# Altium PCB BOOSTController2.PcbDoc
Units mm, origin at the board's own origin, x right, y up, seen from the top; angles counter-clockwise.
Board outline 81.01 x 41 mm, 2 copper layers (Top Layer, Bottom Layer); 11 components, 5 nets, 27 pads, 4 vias.
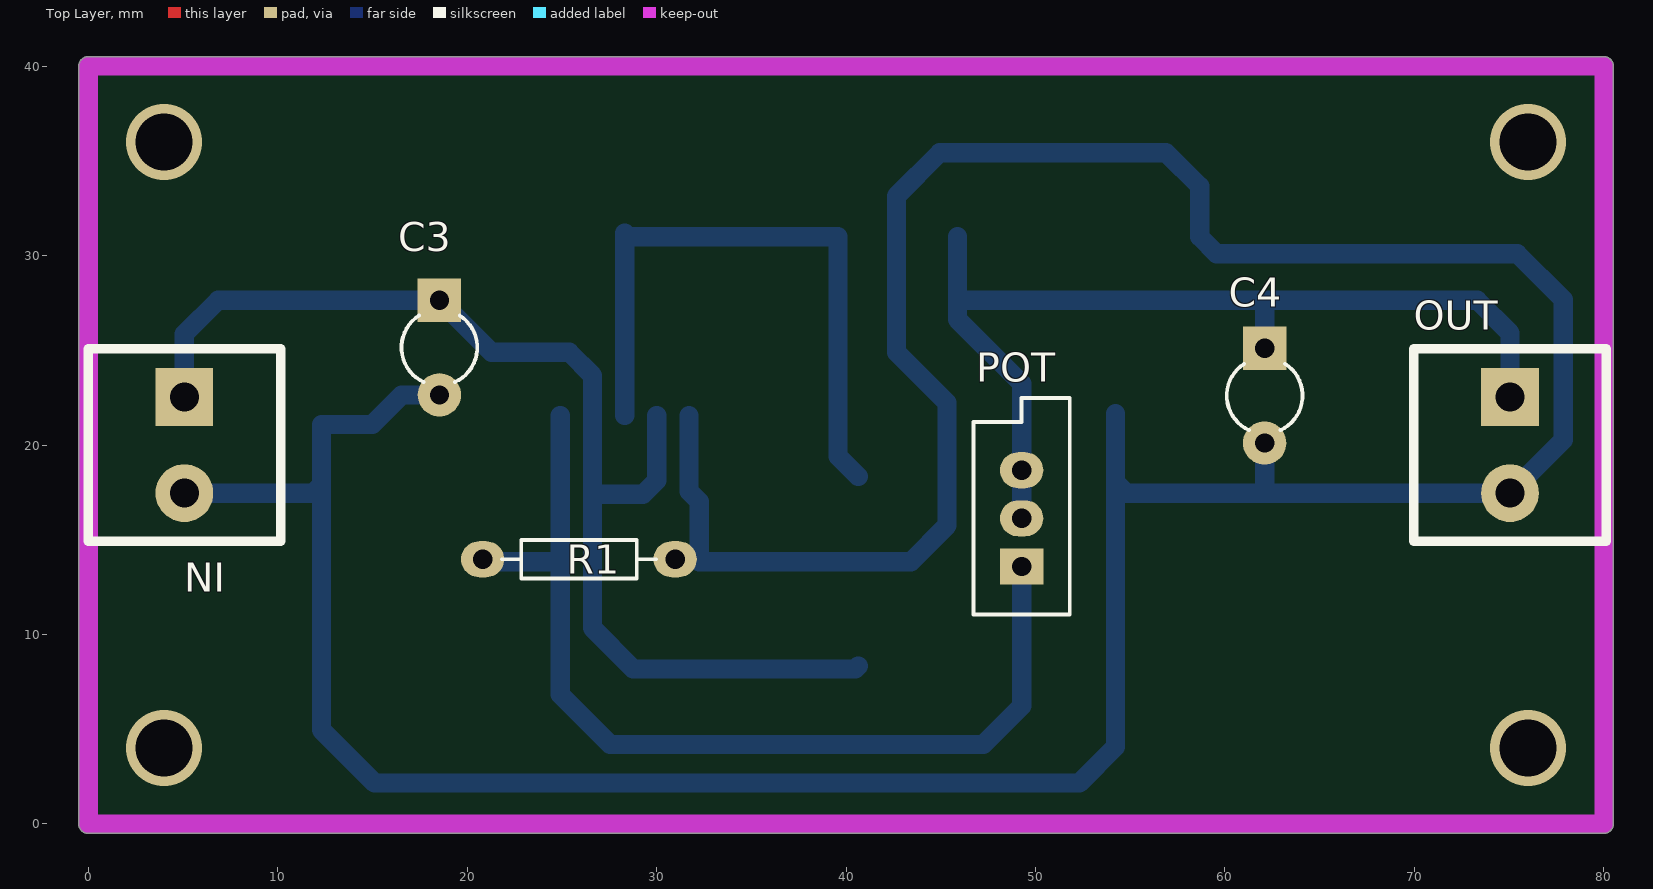
[diagram p0: Top Layer view]
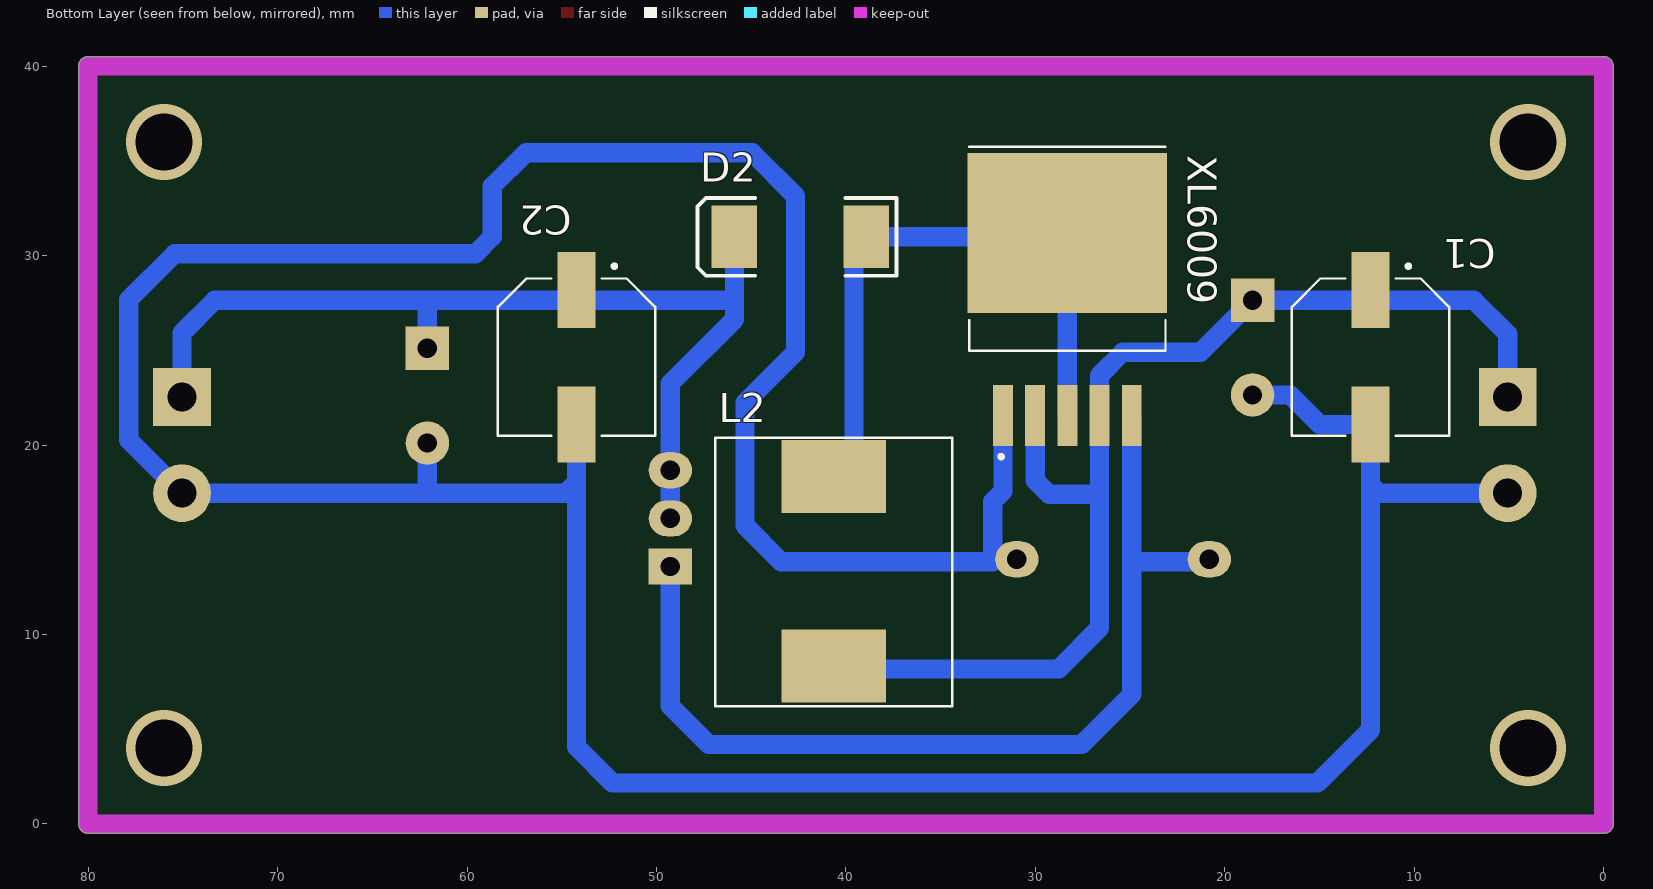
[diagram p1: Bottom Layer view, seen from below]

## Layer stack, top to bottom
Top Solder: solder mask 0.0102, Solder Resist, Dk 3.5
Top Layer: signal copper 0.0356
Dielectric 1: dielectric 0.32, FR-4, Dk 4.8
Bottom Layer: signal copper 0.0356
Bottom Solder: solder mask 0.0102, Solder Resist, Dk 3.5

## Board outline
-0.5,0.1 ccw(c-0.01,0) -0.01,-0.5 80,-0.5 ccw(c80,0) 80.5,0 80.5,40 ccw(c80,40) 80,40.5 0,40.5 ccw(c0,40) -0.5,40

## Design rules (kind name [scope] priority, off if disabled: settings)
Clearance [All] p1: gap=0.254
PolygonConnect [All] p1: connectstyle=Relief reliefconductorwidth=0.254 reliefentries=4 polygonreliefangle="90 Angle" airgapwidth=0.254
RoutingVias [All] p1: holewidth=0.711 width=1.27 viastyle="Through Hole" minholewidth=0.711 minwidth=1.27 maxholewidth=0.711 maxwidth=1.27
SolderMaskExpansion [All] p1: expansion=0.102
Width [All] p1: maxlimit=1.016 minlimit=1.016 preferedwidth=1.016 minimp=50.000000 maximp=50.000000 favimp=50.000000
30 further rules are at their usual default settings.

## Components (designator, comment, footprint, x,y, rotation, side; value= is the part's Value field where it differs from the comment)
C1 "" CapacitorSmd 12.309,24.638 r270 bottom
C2 "" CapacitorSmd 54.219,24.638 r270 bottom
C3 "" CAPR5-4X5 18.532,25.146 r270 top
C4 "" CAPR5-4X5 62.093,22.606 r270 top
D2 "SS34" SMC 42.408,30.988 r0 bottom
IN "Rosita2" Rosita2 5.07,20 r270 top
L2 "" L125 40.63,13.335 r90 bottom
OUT "Rosita2" Rosita2 75.047,20 r270 top
POT "POT Blue" "POT - Blue" 49.266,13.589 r180 top
R1 "Res2" AXIAL-0.4 25.898,13.97 r180 top
XL6009 "XL6009" XL6009 28.311,27.686 r90 bottom

## Footprints (in the part's own frame and the unit in brackets; to place one, negate y for a bottom-side part, rotate by r counter-clockwise, add the part's x,y. Pads: shape width x height; smd on the part's side, far side on the other; paste and mask are expansions set on the pad)
AXIAL-0.4 [mil] "Axial Device, Thru-Hole; 2 Leads; 0.4 in Pin Spacing"
  oval 90x75 hole 40: 1(-200,0) 2(200,0)
  silkscreen extent -160,-40 160,40
CapacitorSmd [mm]
  rect 4x2 smd: 1(-3.55,0) 2(3.55,0)
  silkscreen extent -4.9,-4.15 4.15,4.15, body extent -4.85,-4.15 4.85,4.15, height 10.2
CAPR5-4X5 [mil] "Capacitor; 2 Leads"
  rect 90x90 hole 40: 1(-98.43,0)
  round 90 hole 40: 2(98.43,0)
  silkscreen extent -66,-79 72,79
L125 [mm]
  rect 3.85x5.5 smd: 1(-5,0.01) 2(5,0.01)
  silkscreen extent -7.12,-6.24 7.05,6.26
"POT - Blue" [mil]
  rect 90x75 hole 40: 1(0,0)
  oval 90x75 hole 40: 2(0,-100) 3(0,-200)
  silkscreen extent -100,-350 100,100
Rosita2 [mil]
  rect 120x120 hole 60: 1(-100,0)
  round 120 hole 60: 2(100,0)
  silkscreen extent -200,-200 200,200
SMC [mm] "DO-214-AB/SMC; 2 C-Bend Leads; Body 7.9 x 5.9 mm, inc. leads (LxW)"
  rect 2.4x3.3 smd: 1(-3.475,0) 2(3.475,0)
  silkscreen extent -5.07,-2.05 5.43,2.05
XL6009 [mm]
  rect 3.21x1.05 smd: 1(-6.13,3.4) 2(-6.13,1.7) 3(-6.13,0) 4(-6.13,-1.7) 5(-6.13,-3.4)
  rect 8.46x10.53 smd paste-6: 6(3.5,0)
  silkscreen extent -8.4,-5.18 8.05,5.18

## Part data
C1 C2 C3 C4: library part Cap2, "Capacitor"
D2: library part "D Zener", "Schottky Diode [SS34]"
L2: library part Inductor, "Inductor"
R1: "Resistor"

## Via types
v1: diameter 4, hole 3, Top Layer to Bottom Layer, 4 vias

## Nets (pads, with @x,y where several pads share a name; then routed paths per layer and width w, separated by ;. In a path a pad name is that pad's centre, name@x,y a point inside that pad or via, vN(x,y) a via of type N, cw(c..) or ccw(c..) an arc to the next point about the centre after c; other vN are vias at no path point)
GND: C1.2 C2.2 C3.2 C4.2 IN.2 OUT.2 R1.1 XL6009.1 | length 208.2
  Bottom Layer w1.016: IN.2 11.862,17.46 12.309,17.907 ; C3.2 16.54,22.646 14.982,21.088 C1.2 12.309,17.907 ; XL6009.1 31.711,17.555 32.248,17.018 32.248,13.843 43.424,13.843 45.329,15.748 45.329,22.225 42.662,24.892 42.662,33.147 44.948,35.433 56.886,35.433 58.664,33.655 58.664,30.988 59.553,30.099 75.428,30.099 77.851,27.676 77.851,20.264 OUT.2 62.093,17.46 ; C2.2@54.224,21.645 54.224,18.034 ; C4.2 62.093,17.46 ; 12.309,17.907 12.309,4.953 15.103,2.159 52.314,2.159 54.224,4.069 54.224,18.034 ; 54.224,18.034 54.798,17.46 62.093,17.46
NetC1_1: C1.1 C3.1 IN.1 L2.1 XL6009.2 XL6009.4 | length 62.7
  Bottom Layer w1.016: IN.1 5.07,25.858 6.858,27.646 C3.1 21.286,24.892 25.39,24.892 26.611,23.671 XL6009.4 26.611,10.336 28.77,8.177 40.482,8.177 L2.1 ; 26.611,17.399 29.28,17.399 30.011,18.13 XL6009.2
NetC2_1: C2.1 C4.1 D2.2 OUT.1 POT.2 POT.3 | length 53
  Bottom Layer w1.016: D2.2 45.883,27.645 ; POT.2 POT.3 49.266,23.241 45.883,26.624 45.883,27.645 ; C4.1 62.093,27.645 ; OUT.1@75.047,21.59 75.047,25.908 73.31,27.645 62.093,27.645 ; 45.883,27.645 62.093,27.645
NetD2_1: D2.1 L2.2 XL6009.3 XL6009.6 | length 34.1
  Bottom Layer w1.016: XL6009.3 XL6009.6 28.509,30.988 39.568,30.988 39.568,19.407 L2.2
NetPOT_1: POT.1 R1.2 XL6009.5 | length 52.5
  Bottom Layer w1.016: R1.2@20.818,13.843 24.911,13.843 ; XL6009.5 24.911,13.843 ; POT.1 49.266,6.223 47.234,4.191 27.549,4.191 24.911,6.829 24.911,13.843
copper on no net:
  other v1: 4,4 76,4 4,36 76,36

## Keep-outs
Keep-Out Layer:
  lines w1: -0.01,0 80,0 80,40 0,40 0,0